# Altium PCB RF315Mhz.PcbDoc (part 1 of 2)
Units mm, origin at the board's own origin, x right, y up, seen from the top; angles counter-clockwise.
Board outline 104 x 96 mm, 2 copper layers (Top Layer, Bottom Layer); 125 components, 20 nets, 503 pads, 66 vias.
Unrouted connection lines stored in the file: 1.
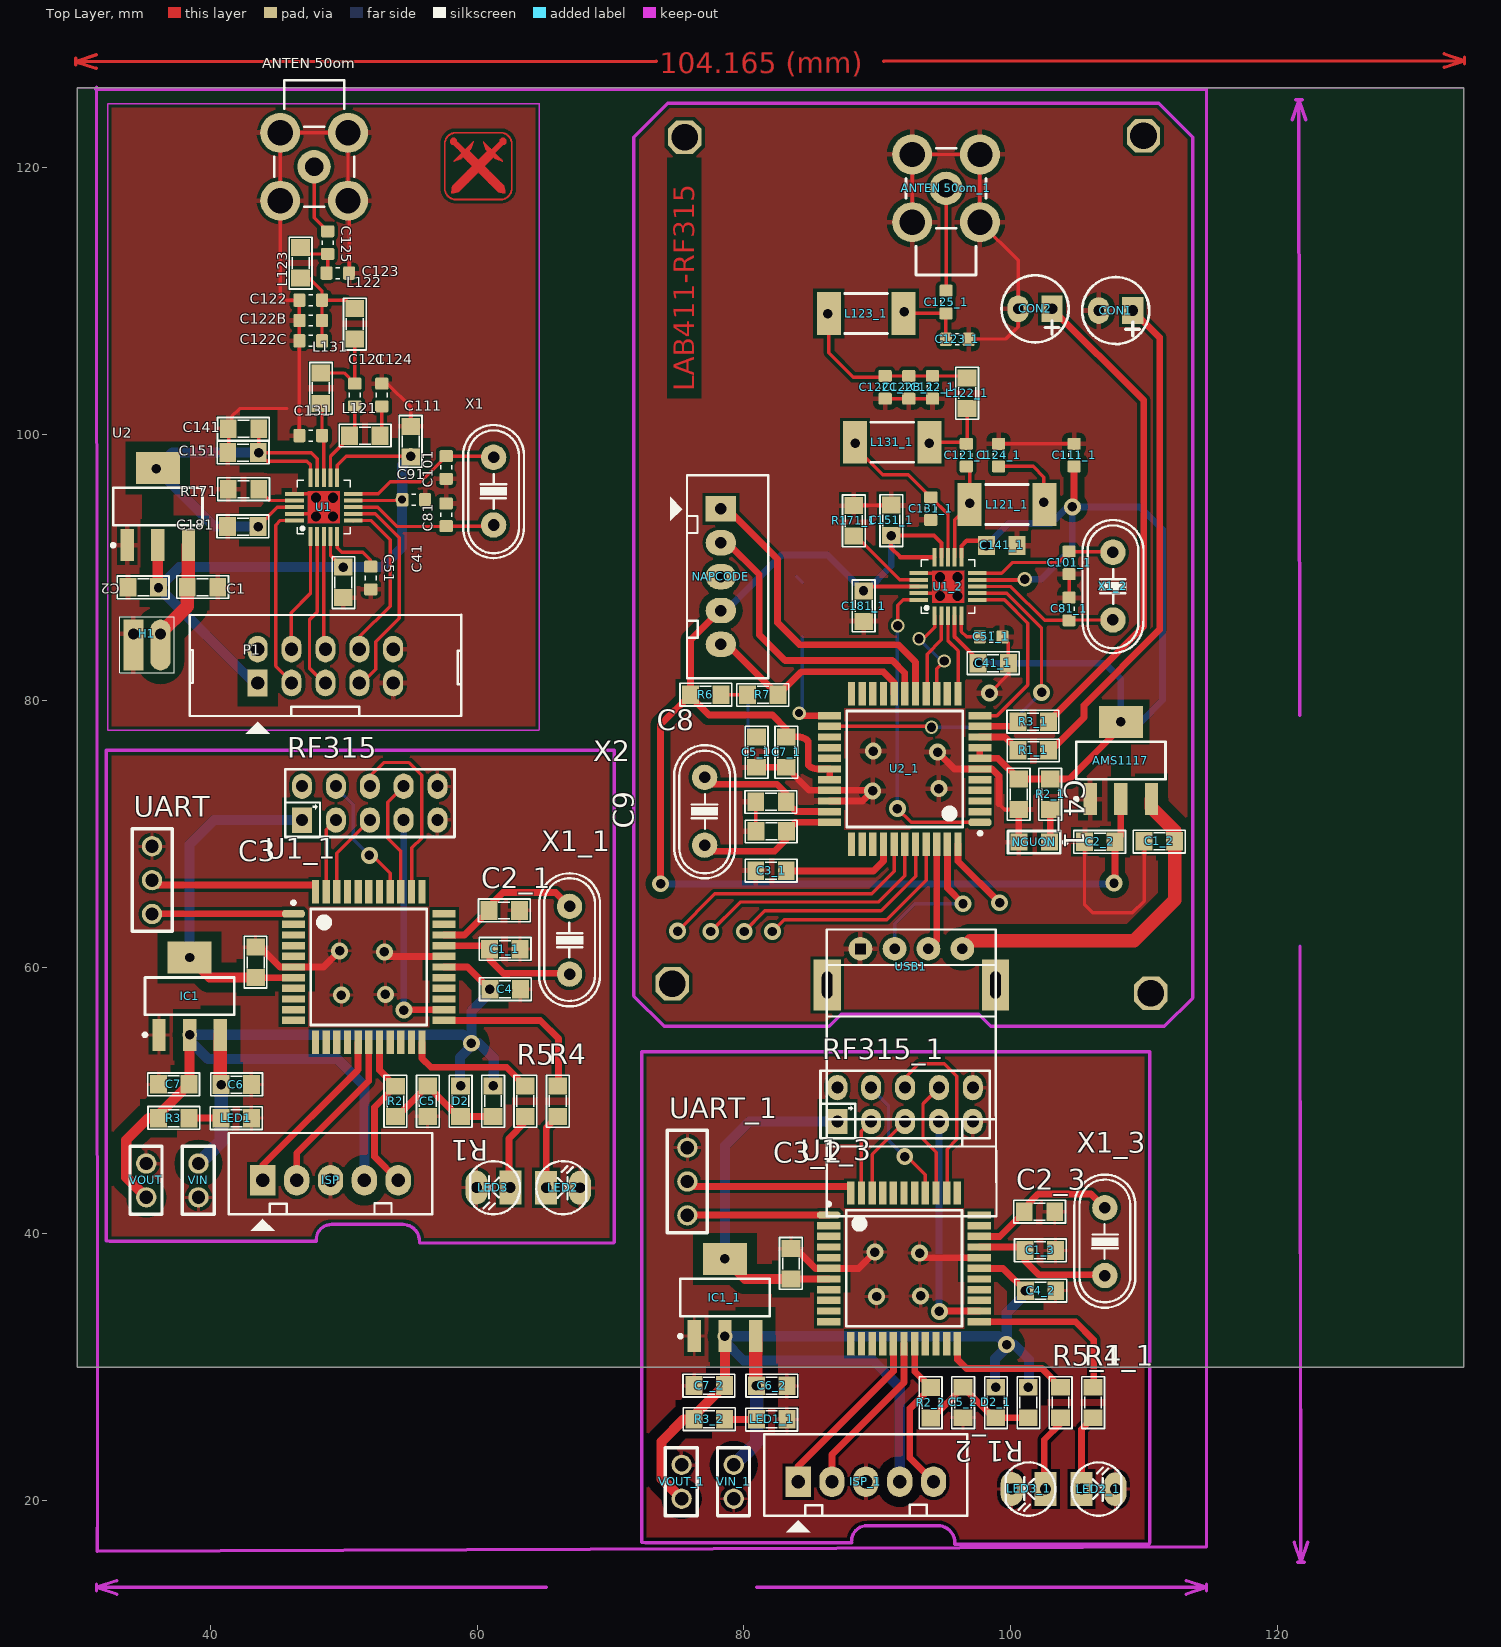
[diagram p0: Top Layer view]
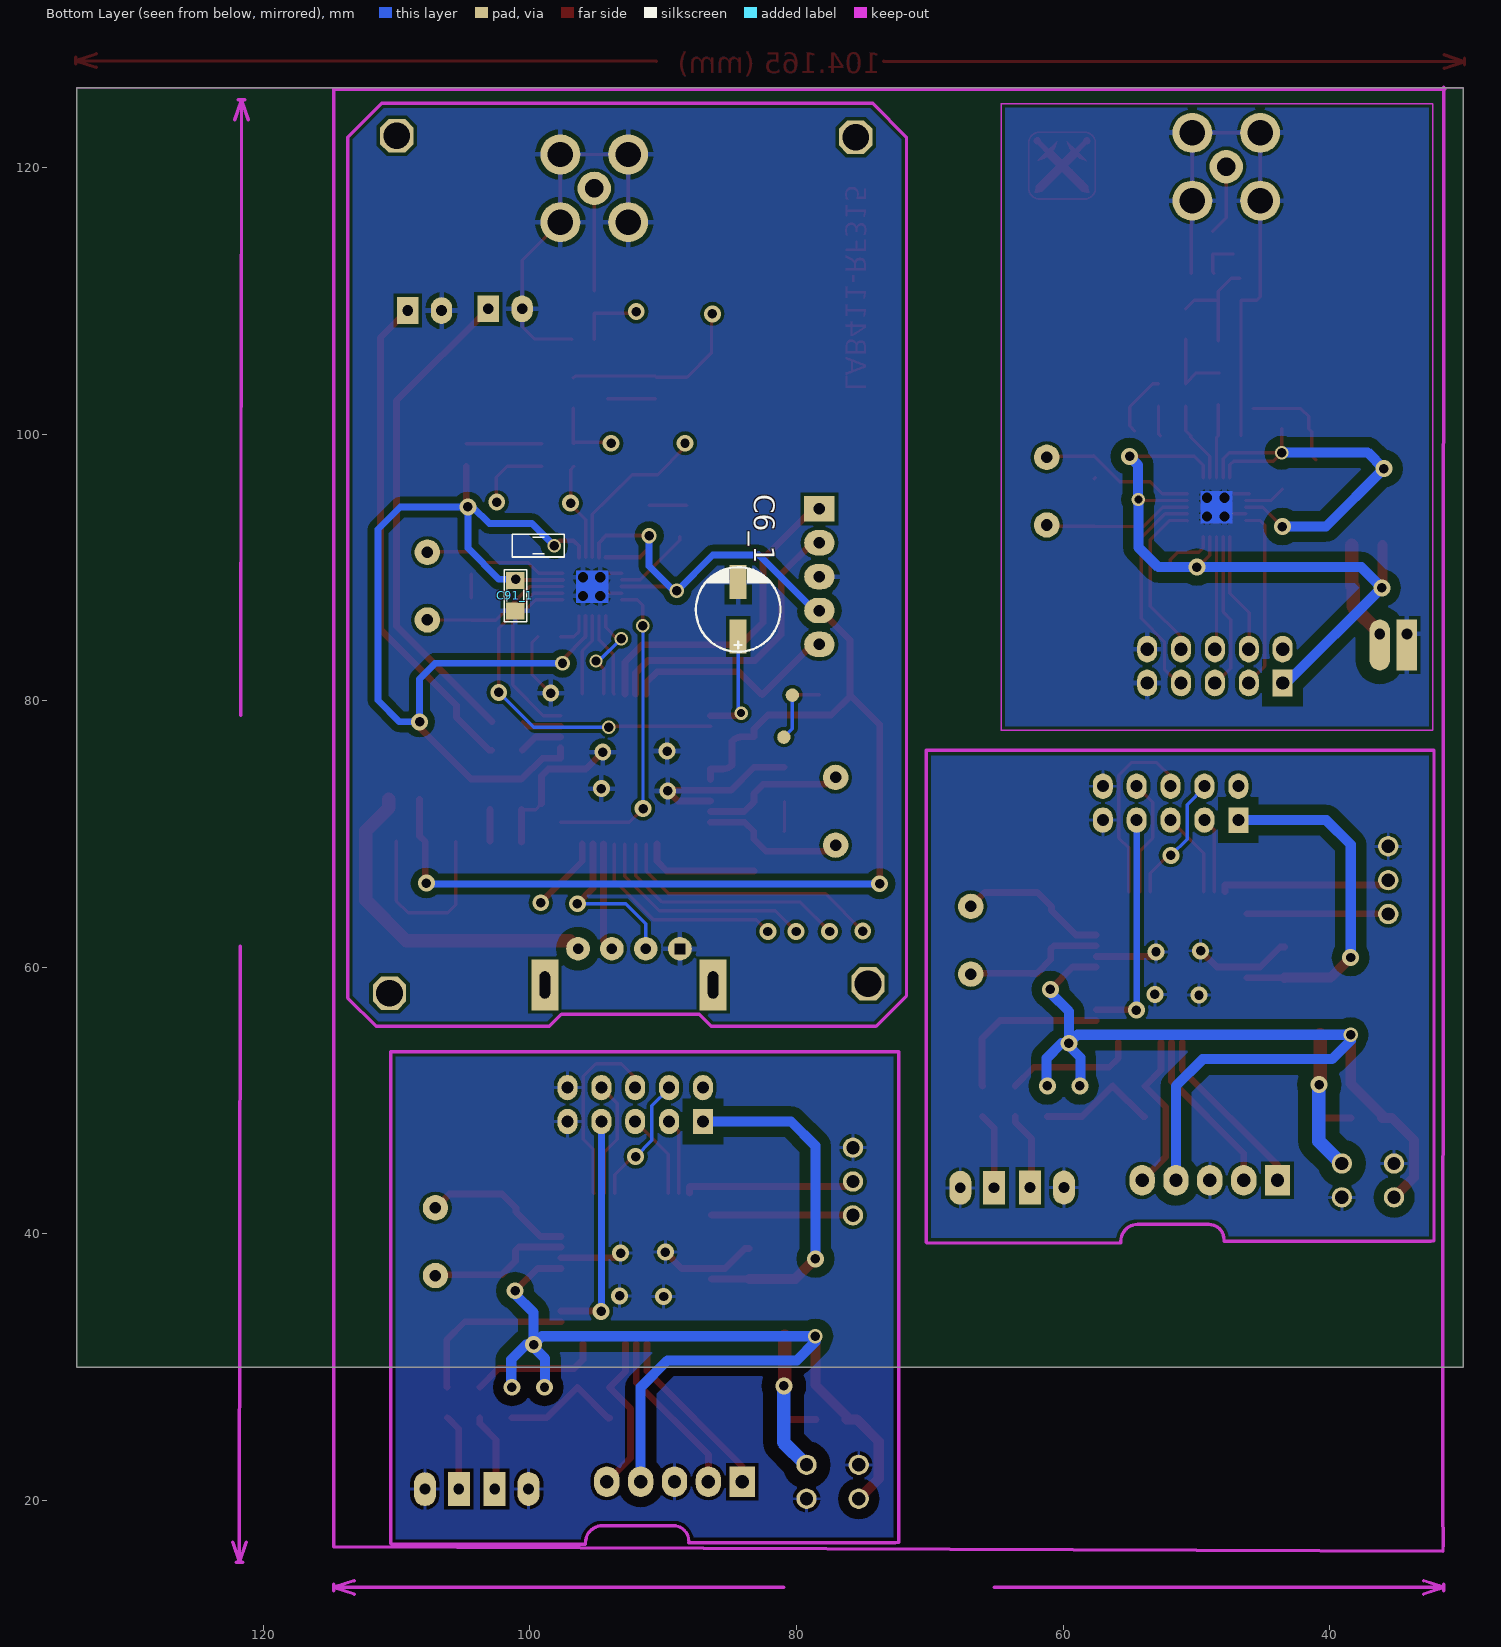
[diagram p1: Bottom Layer view, seen from below]

## Layer stack, top to bottom
Top Layer: signal copper 0.0356
Dielectric: dielectric 0.32, FR-4, Dk 4.8
Bottom Layer: signal copper 0.0356

## Board outline
30,30 30,126 134,126 134,30

## Design rules (kind name [scope] priority, off if disabled: settings)
Clearance 5 [InNet('+5V')] p1: gap=1.016
Clearance 3.3 [InNet('+3.3V')] p2: gap=0.762
Clearance [All] p3: gap=0.254
ComponentClearance [All] p1: gap=0.051 collisioncheckmode=3 verticalgap=0.051 showdistances=FALSE
PolygonConnect [All] p1: connectstyle=Relief reliefconductorwidth=0.381 reliefentries=4 polygonreliefangle="90 Angle" airgapwidth=0.254
RoutingVias [All] p1: holewidth=0.711 width=1.27 viastyle="Through Hole" minholewidth=0.711 minwidth=1.27 maxholewidth=0.711 maxwidth=1.27
ShortCircuit [All] p1: allowed=TRUE
SilkToSilkClearance [All] p1: silktosilkclearance=0.051
SilkToSolderMaskClearance [IsPad] p1: minsilkscreentomaskgap=0 clearancetoexposedcopper=TRUE
SolderMaskExpansion [All] p1: expansion=0.102
Width 5v [InNet('+5V')] p1: maxlimit=1.016 minlimit=1.016 preferedwidth=1.016
Width 3.3v [InNet('+3.3V')] p2: maxlimit=0.254 minlimit=0.254 preferedwidth=0.254
Width [All] p3: maxlimit=0.254 minlimit=0.254 preferedwidth=0.254
24 further rules are at their usual default settings.

## Components (designator, comment, footprint, x,y, rotation, side; value= is the part's Value field where it differs from the comment)
AMS1117 "LM317" SOT223-4N 108.28,75.514 r90 top
"ANTEN 50om" "Header 2" MCX5.08-H5 47.766,126.557 r270 top
"ANTEN 50om_1" "Header 2" MCX5.08-H5 95.174,111.938 r90 top (schematic designator "ANTEN 50om")
C1 "104" SM-0805#1 39.395,88.519 r180 top
C1_1 "103" SM-0805#1 62.078,61.366 r180 top (schematic designator C1)
C1_2 "104" SM-0805#1 111.176,69.444 r0 top (schematic designator C1)
C1_3 "103" SM-0805#1 102.235,38.76 r180 top (schematic designator C1)
C2 "104" SM-0805#1 34.95,88.519 r0 top
C2_1 "103" SM-0805#1 62.027,64.262 r180 top (schematic designator C2)
C2_2 "104" SM-0805#1 106.705,69.418 r0 top (schematic designator C2)
C2_3 "103" SM-0805#1 102.184,41.656 r180 top (schematic designator C2)
C3 "103" SM-0805#1 43.383,60.376 r270 top
C3_1 "103" SM-0805#1 82.042,67.234 r180 top (schematic designator C3)
C3_2 "103" SM-0805#1 83.541,37.77 r270 top (schematic designator C3)
C4 "103" SM-0805#1 62.103,58.344 r180 top
C4_1 "103" SM-0805#1 100.635,72.974 r270 top (schematic designator C4)
C4_2 "103" SM-0805#1 102.26,35.738 r180 top (schematic designator C4)
C5 "103" SM-0805#1 56.286,49.962 r90 top
C5_1 "103" SM-0805#1 80.95,76.149 r90 top (schematic designator C5)
C5_2 "103" SM-0805#1 96.444,27.356 r90 top (schematic designator C5)
C6 "103" SM-0805#1 41.935,51.206 r180 top
C6_1 "100uF/35V" CP1/2.5_SM 84.379,85.573 r90 bottom (schematic designator C6)
C6_2 "103" SM-0805#1 82.093,28.6 r180 top (schematic designator C6)
C7 "103" SM-0805#1 37.236,51.232 r0 top
C7_1 "103" SM-0805#1 83.185,76.149 r90 top (schematic designator C7)
C7_2 "103" SM-0805#1 77.394,28.626 r0 top (schematic designator C7)
C8 "33pF" SM-0805#1 82.067,70.206 r0 top
C9 "33pF" SM-0805#1 82.042,72.415 r0 top
C41 "104" SM-0805#1 49.962,88.875 r90 top
C41_1 "104" SM-0805#1 98.704,82.804 r180 top (schematic designator C41)
C51 "104" 0603ESDA#1 52.019,89.205 r90 top
C51_1 "104" 0603ESDA#2 98.552,84.785 r180 top (schematic designator C51)
C81 "27pF" 0603ESDA#1 57.672,93.943 r270 top
C81_1 "27pF" 0603ESDA#2 104.402,86.883 r270 top (schematic designator C81)
C91 "103" 0603ESDA#2 55.245,95.072 r180 top
C91_1 "103" SM-0805#1 101.092,87.884 r90 bottom (schematic designator C91)
C101 "27pF" 0603ESDA#1 57.672,97.499 r90 top
C101_1 "27pF" 0603ESDA#2 104.402,90.337 r90 top (schematic designator C101)
C111 "220pF" SM-0805#1 55.016,99.441 r270 top
C111_1 "220pF" 0603ESDA#2 104.775,98.425 r270 top (schematic designator C111)
C121 "6.8pF" 0603ESDA#1 50.814,102.935 r270 top
C121_1 "6.8pF" 0603ESDA#2 96.698,98.425 r270 top (schematic designator C121)
C122 "12pF" 0603ESDA#1 47.512,110.047 r180 top
C122_1 "12pF" 0603ESDA#2 94.158,103.505 r270 top (schematic designator C122)
C122B "12pF" 0603ESDA#1 47.512,108.523 r180 top
C122B_1 "12pF" 0603ESDA#2 92.38,103.505 r270 top (schematic designator C122B)
C122C "12pF" 0603ESDA#1 47.512,106.999 r180 top
C122C_1 "12pF" 0603ESDA#2 90.602,103.505 r270 top (schematic designator C122C)
C123 "6.8pF" 0603ESDA#1 49.544,112.079 r0 top
C123_1 "6.8pF" 0603ESDA#2 96.012,107.112 r0 top (schematic designator C123)
C124 "220pF" 0603ESDA#1 52.846,102.935 r270 top
C124_1 "220pF" 0603ESDA#2 99.111,98.425 r270 top (schematic designator C124)
C125 "220pF" 0603ESDA#1 48.782,114.365 r90 top
C125_1 "220pF" 0603ESDA#2 95.174,109.906 r90 top (schematic designator C125)
C131 "6.8pF" 0603ESDA#1 47.512,99.887 r180 top
C131_1 "27" 0603ESDA#2 94.031,94.412 r270 top (schematic designator C131)
C141 "103" SM-0805#1 42.469,100.406 r0 top
C141_1 "103" SM-0805#2 99.365,91.643 r180 bottom (schematic designator C141)
C151 "220pF" SM-0805#1 42.432,98.617 r180 top
C151_1 "220pF" SM-0805#1 91.059,93.523 r90 top (schematic designator C151)
C181 "220pF" SM-0805#1 42.418,93.066 r180 top
C181_1 "27pF" SM-0805#1 89.002,87.097 r270 top (schematic designator C181)
CON1 "LED" LED3mm 107.899,109.271 r180 top
CON2 "LED" LED3mm 101.854,109.398 r180 top
D2 "1N4007" SM-0805#1 58.75,49.962 r90 top
D2_1 "1N4007" SM-0805#1 98.908,27.356 r90 top (schematic designator D2)
H1 "Header 2" HDR1X2 33.96,85.014 r0 top
IC1 "LM1117" SOT223-4N 38.43,57.836 r90 top
IC1_1 "LM1117" SOT223-4N 78.588,35.23 r90 top (schematic designator IC1)
ISP "JP5" CON5#1 43.917,44.018 r0 top
ISP_1 "JP5" CON5#1 84.074,21.412 r0 top (schematic designator ISP)
L121 "33nH" SM-0805#1 51.576,99.887 r180 top
L121_1 "27nH" SM-2512 99.746,94.717 r180 top (schematic designator L121)
L122 "18nH" SM-0805#1 50.814,108.269 r90 top
L122_1 "22nH" SM-0805#1 96.749,103.073 r90 top (schematic designator L122)
L123 "33nH" SM-0805#1 46.75,112.841 r90 top
L123_1 "27nH" SM-2512 89.179,109.042 r0 top (schematic designator L123)
L131 "33nH" SM-0805#1 48.274,103.443 r90 top
L131_1 "27nH" SM-2512 91.135,99.39 r0 top (schematic designator L131)
LED1 "LED" SM-0805#1 41.935,48.692 r0 top
LED1_1 "LED" SM-0805#1 82.093,26.086 r0 top (schematic designator LED1)
LED2 "LED" LED-3 65.176,43.459 r0 top
LED2_1 "LED" LED-3 105.334,20.853 r0 top (schematic designator LED2)
LED3 "LED" LED-3 62.484,43.477 r180 top
LED3_1 "LED" LED-3 102.641,20.871 r180 top (schematic designator LED3)
NAPCODE "JP5" CON5#2 78.283,94.386 r270 top
NGUON "LED" LED0805 101.778,69.393 r180 top
P1 "Header 6" Hed2X5 43.536,81.331 r0 top
R1 "1k" SM-0805#1 61.189,49.962 r90 top
R1_1 "220" SM-0805#1 101.727,76.276 r0 top (schematic designator R1)
R1_2 "1k" SM-0805#1 101.346,27.356 r90 top (schematic designator R1)
R2 "1k" SM-0805#1 53.873,49.936 r270 top
R2_1 "220" SM-0805#1 102.997,72.974 r270 top (schematic designator R2)
R2_2 "1k" SM-0805#1 94.031,27.33 r270 top (schematic designator R2)
R3 "1k" SM-0805#1 37.236,48.692 r180 top
R3_1 "220" SM-0805#1 101.702,78.435 r0 top (schematic designator R3)
R3_2 "1k" SM-0805#1 77.394,26.086 r180 top (schematic designator R3)
R4 "1k" SM-0805#1 66.04,49.962 r90 top
R4_1 "1k" SM-0805#1 106.197,27.356 r90 top (schematic designator R4)
R5 "1k" SM-0805#1 63.602,49.962 r90 top
R5_1 "1k" SM-0805#1 103.759,27.356 r90 top (schematic designator R5)
R6 "1k" SM-0805#1 77.14,80.442 r180 top
R7 "1k" SM-0805#1 81.432,80.442 r0 top
R171 "56K" SM-0805#1 42.469,95.86 r180 top
R171_1 "56K" SM-0805#1 88.24,93.497 r90 top (schematic designator R171)
RF315 "Header 5x2" HED2X5_cen 46.863,71.044 r0 top
RF315_1 "Header 5x2" HED2X5_cen 87.02,48.438 r0 top (schematic designator RF315)
U1 "CC1101" QFN-20Pin 46.496,92.521 r90 top
U1_1 "PIC18F46K20T-I/PT" TQFP-PT44_N 51.867,60.02 r0 top (schematic designator U1)
U1_2 "CC1101" QFN-20Pin 93.32,86.563 r90 top (schematic designator U1)
U1_3 "PIC18F46K20T-I/PT" TQFP-PT44_N 92.024,37.414 r0 top (schematic designator U1)
U2 "LM1117" SOT223-4N 36.043,94.564 r90 top
U2_1 "PIC18F45J50-I/ML" PIC18F45J50SMD 92.075,74.879 r180 top (schematic designator U2)
UART "JP3" CON3 35.611,66.497 r90 top
UART_1 "JP3" CON3 75.768,43.891 r90 top (schematic designator UART)
USB1 "USB-S" USB-A 96.393,61.392 r180 top
VIN "JP2" CON2 39.091,44.044 r90 top
VIN_1 "JP2" CON2 79.248,21.438 r90 top (schematic designator VIN)
VOUT "JP2" CON2 35.179,44.044 r90 top
VOUT_1 "JP2" CON2 75.336,21.438 r90 top (schematic designator VOUT)
X1 "26Mhz" XT2 61.228,95.721 r90 top
X1_1 "4Mhz" XT2 66.929,62.027 r270 top (schematic designator X1)
X1_2 "26Mhz" XT2 107.696,88.595 r90 top (schematic designator X1)
X1_3 "4Mhz" XT2 107.086,39.421 r270 top (schematic designator X1)
X2 "20Mhz" XT2 77.064,71.704 r90 top

## Footprints (in the part's own frame and the unit in brackets; to place one, negate y for a bottom-side part, rotate by r counter-clockwise, add the part's x,y. Pads: shape width x height; smd on the part's side, far side on the other; paste and mask are expansions set on the pad)
0603ESDA#1 [mm] "Chip ESD suppressor, Body 1.6x0.8mm, 0603, IPC Medium Density"
  round 0.254 on Mech14: 0(0,0)
  rrect25% 0.9x1 smd: 1(-0.85,0) 2(0.85,0)
  Top Layer pour cut-out: -0.4,0.6 0.4,0.6 0.4,-0.6 -0.4,-0.6
  silkscreen extent -0.15,-0.41 0.15,0.41, body extent -0.85,-0.45 0.85,0.45, height 0.79
0603ESDA#2 [mm] "Chip ESD suppressor, Body 1.6x0.8mm, 0603, IPC Medium Density"
  round 0.254 on Mech15: 0(0,0)
  rrect25% 0.9x1 smd: 1(-0.85,0) 2(0.85,0)
  Top Layer pour cut-out: -0.65,0.5 -0.45,0.7 0.45,0.7 0.65,0.5 0.65,-0.5 0.45,-0.7 -0.45,-0.7 -0.65,-0.5
  silkscreen extent -0.15,-0.41 0.15,0.41, body extent -0.85,-0.45 0.85,0.45, height 0.79
CON2 [mm] "2-Pin Connector; pitch 2.54mm"
  round 1.524 hole 1: 1(-1.3,0) 2(1.24,0)
  silkscreen extent -2.58,-1.18 2.52,1.22
CON3 [mm] "3-Pin Connector; pitch 2.54mm"
  round 1.524 hole 1: 1(-2.5,0) 2(0.04,0) 3(2.58,0)
  silkscreen extent -3.8,-1.5 3.9,1.5
CON5#1 [mm] "CON5"
  rect 1.905x2.286 hole 1: 1(0,0)
  oval 1.905x2.286 hole 1: 2(2.54,0) 3(5.08,0) 4(7.62,0) 5(10.16,0)
  silkscreen extent -2.54,-3.8 12.7,3.56, body extent -2.63,-2.7 12.83,3.7, height 7
CON5#2 [mm] "CON5"
  rect 1.905x2.286 hole 0.864: 1(0,0)
  oval 1.905x2.286 hole 0.864: 2(2.54,0) 3(5.08,0) 4(7.62,0) 5(10.16,0)
  silkscreen extent -2.54,-3.8 12.7,3.56
CP1/2.5_SM [mil] "Tu hoa SMD 33 >100 uF,50V, 220uF/16V,25V"
  rect 100x50 smd: 1(-30,0) 2(131,0)
  silkscreen extent -75,-125 175,125
HDR1X2 [mil] "Connector; Header; 2 Position"
  rect 60x150 hole 32 copper offset 0,-33: 1(10,0)
  oval 60x150 hole 32 copper offset 0,-33: 2(90,0)
  silkscreen extent -30,-115 130,50
Hed2X5 [mm] "Header 10x2,20 pin, connecter"
  rect 1.5x2 hole 1: 1(0,0)
  oval 1.5x2 hole 1: 2(0,2.54) 3(2.54,0) 4(2.54,2.54) 5(5.08,0) 6(5.08,2.54) 7(7.62,0) 8(7.62,2.54) 9(10.16,0) 10(10.16,2.54)
  silkscreen extent -5.1,-3.81 15.29,5.11
HED2X5_cen [mm] "Connector; Header; 5x2 Position"
  rect 1.5x1.9 hole 0.9: 1(0,0)
  oval 1.5x1.9 hole 0.9: 2(2.54,0) 3(5.08,0) 4(7.62,0) 5(10.16,0) 6(0,2.54) 7(2.54,2.54) 8(5.08,2.54) 9(7.62,2.54) 10(10.16,2.54)
  silkscreen extent -1.27,-1.27 11.43,3.81, body extent -1.24,-10.02 11.46,2.86, height 5.02
LED3mm [mm]
  rect 1.6x2 hole 0.8: 1(-1.27,0)
  oval 1.6x2 hole 0.8: 2(1.27,0)
  silkscreen extent -2.52,-2.51 2.51,2.52, body extent -1.99,-1.5 1.99,1.99, height 5.38
LED0805 [mil] "Chip Resistor; Body 2.0 x 1.3 mm (LxW typ)"
  rect 50x50 smd: 1(-45,0) 2(45,0)
  silkscreen extent -97,-33 77,33, body extent -60,-25 60,25, height 47
LED-3 [mil] "LED 2 PIN, 3ly Only colour"
  rect 65x100 hole 32: 1(0,0)
  oval 65x100 hole 32: 2(100,0)
  silkscreen extent -29,-78 118,79, body extent -29,-75 109,75, height 256
MCX5.08-H5 [mm] "Chan anten"
  round 2.5 hole 1.4: 1(6.5,0)
  round 3 hole 1.9: 2(3.96,2.54) 2(3.96,-2.54) 2(9.04,-2.54) 2(9.04,2.54)
  silkscreen extent 0,-3 9.5,3
PIC18F45J50SMD [mm] "PIC18F45J50SMD"
  oct 1.75x0.55 smd: 1(-5.65,4)
  rect 1.75x0.55 smd: 2(-5.65,3.2) 3(-5.65,2.4) 4(-5.65,1.6) 5(-5.65,0.8) 6(-5.65,0) 7(-5.65,-0.8) 8(-5.65,-1.6) 9(-5.65,-2.4) 10(-5.65,-3.2) 11(-5.65,-4) 23(5.65,-4) 24(5.65,-3.2) 25(5.65,-2.4) 26(5.65,-1.6) 27(5.65,-0.8) 28(5.65,0) 29(5.65,0.8) 30(5.65,1.6) 31(5.65,2.4) 32(5.65,3.2) 33(5.65,4)
  rect 0.55x1.75 smd: 12(-4,-5.65) 13(-3.2,-5.65) 14(-2.4,-5.65) 15(-1.6,-5.65) 16(-0.8,-5.65) 17(0,-5.65) 18(0.8,-5.65) 19(1.6,-5.65) 20(2.4,-5.65) 21(3.2,-5.65) 22(4,-5.65) 34(4,5.65) 35(3.2,5.65) 36(2.4,5.65) 37(1.6,5.65) 38(0.8,5.65) 39(0,5.65) 40(-0.8,5.65) 41(-1.6,5.65) 42(-2.4,5.65) 43(-3.2,5.65) 44(-4,5.65)
  silkscreen extent -5.77,-4.35 4.35,4.95, body extent -5,-5 5,5, height 1.2
QFN-20Pin [mm] "QFN 20pin 4x4mm"
  rect 1.4x0.3 smd paste+0.1 mask+0.1: 1(-0.2,-1) 2(-0.2,-1.5) 3(-0.2,-2) 4(-0.2,-2.5) 5(-0.2,-3) 11(4.2,-3) 12(4.2,-2.5) 13(4.2,-2) 14(4.2,-1.5) 15(4.2,-1)
  rect 0.3x1.4 smd paste+0.1 mask+0.1: 6(1,-4.2) 7(1.5,-4.2) 8(2,-4.2) 9(2.5,-4.2) 10(3,-4.2) 16(3,0.2) 17(2.5,0.2) 18(2,0.2) 19(1.5,0.2) 20(1,0.2)
  round 0 hole 0.762: 21(1.3,-1.4) 21(1.3,-2.7) 21(2.7,-2.7) 21(2.7,-1.4)
  Top Layer region: 0.8,-0.8 3.2,-0.8 3.2,-3.2 0.8,-3.2
  Bottom Layer region: 0.8,-0.8 3.2,-0.8 3.2,-3.2 0.8,-3.2
  Top Overlay keep-out circle w0.254: c0.4,-0.4 r0.1
  silkscreen extent 0,-4 4,0
SM-0805#1 [mil] "Compoment SMD 80x50mil"
  rect 50x55 smd: 1(-45,0) 2(45,0)
  silkscreen extent -77,-34 76,33, body extent -40,-27 40,23, height 24
SM-0805#2 [mil] "Compoment SMD 80x50mil"
  rect 50x55 smd far side: 1(-45,0) 2(45,0)
  silkscreen extent -77,-34 76,33, body extent -40,-27 40,23, height 24
SM-2512 [mm] "Chip Resistor; Body 6.3 x 3.2 mm (LxW typ) - C"
  rect 1.8x3.2 smd: 1(-2.8,0) 2(2.8,0)
  silkscreen extent -1.6,-1.5 1.6,1.5
SOT223-4N [mm] "SOT223, 4-Leads, Body 6.5x3.5mm, Pitch 2.3mm, Lead Span 7mm, IPC Medium Density"
  rect 2.4x1 smd: 1(-2.9,2.3) 2(-2.9,0) 3(-2.9,-2.3)
  rect 2.4x3.3 smd: 4(2.9,0)
  silkscreen extent -3.02,-3.35 1.4,3.47, body extent -3.39,-3.27 3.5,3.23, height 1.72
TQFP-PT44_N [mm] "Thin QFP, 44-Leads, Body 10x10mm, Pitch 0.8mm, IPC Medium Density"
  oct 1.75x0.55 smd: 1(-5.65,4)
  rect 1.75x0.55 smd: 2(-5.65,3.2) 3(-5.65,2.4) 4(-5.65,1.6) 5(-5.65,0.8) 6(-5.65,0) 7(-5.65,-0.8) 8(-5.65,-1.6) 9(-5.65,-2.4) 10(-5.65,-3.2) 11(-5.65,-4) 23(5.65,-4) 24(5.65,-3.2) 25(5.65,-2.4) 26(5.65,-1.6) 27(5.65,-0.8) 28(5.65,0) 29(5.65,0.8) 30(5.65,1.6) 31(5.65,2.4) 32(5.65,3.2) 33(5.65,4)
  rect 0.55x1.75 smd: 12(-4,-5.65) 13(-3.2,-5.65) 14(-2.4,-5.65) 15(-1.6,-5.65) 16(-0.8,-5.65) 17(0,-5.65) 18(0.8,-5.65) 19(1.6,-5.65) 20(2.4,-5.65) 21(3.2,-5.65) 22(4,-5.65) 34(4,5.65) 35(3.2,5.65) 36(2.4,5.65) 37(1.6,5.65) 38(0.8,5.65) 39(0,5.65) 40(-0.8,5.65) 41(-1.6,5.65) 42(-2.4,5.65) 43(-3.2,5.65) 44(-4,5.65)
  silkscreen extent -5.77,-4.35 4.35,4.95, body extent -5,-5 5,5, height 1.2
USB-A [mil]
  round 70 hole 31: 1(0,0) 2(100,0) 3(200,0)
  round 70 hole 31 square: 4(301,0)
  rect 80x150 hole 31 slot 80 at 90 deg: 5(-98,107) 6(399,107)
  silkscreen extent -101,-57 401,790, body extent -97,0 399,784, height 177
XT2 [mil] "Footpin for Crystal 2 pin"
  round 75 hole 34: 1(-100,0) 2(100,0)
  silkscreen extent -198,-90 195,90, body extent -233,-93 213,90, height 138

## Part data
AMS1117: "Adj Voltage +1.2 -> +37V"
"ANTEN 50om" "ANTEN 50om_1" H1: library part Hed2, "Header 2 (Green)"
C1 C1_2 C2 C2_2: library part Cap, "Capacitor"
C1_1 C1_3 C2_1 C2_3 C3 C3_1 C3_2 C4 C4_1 C4_2 C5 C5_1 C5_2 C6 C6_2 C7 C7_1 C7_2 C41 C41_1 C51 C51_1 C81 C81_1 C91 C91_1 C101 C101_1 C111 C111_1 C121 C121_1 C122 C122_1 C122B C122B_1 C122C C122C_1 C123 C123_1 C124 C124_1 C125 C125_1 C131 C131_1 C141 C141_1 C151 C151_1 C181 C181_1: library part CM, "Cap SMD"
C6_1: library part CP3, "Cap 100uF/35V - 470uF/16V"
C8 C9: library part CN0, "Cremic For Xtal 1pF => 100pF"
CON1 CON2 LED1 LED1_1 LED2 LED2_1 LED3 LED3_1 NGUON: "LED Single colour Green and Red"
D2 D2_1: library part D1A, "Diode 1A"
IC1 IC1_1 U2: "3v3"
ISP ISP_1 NAPCODE: library part Con5, "Connector 5"
L121 L121_1 L122 L122_1 L123 L123_1 L131 L131_1: library part L1, "Inductor"
P1: "Header, 6-Pin"
R1 R1_1 R1_2 R2 R2_1 R2_2 R3 R3_1 R3_2 R4 R4_1 R5 R5_1 R6 R7: library part R, "Resistor 1/4W"
R171 R171_1: library part RM, "Resistor SMD"
RF315 RF315_1: library part HED5x2
U1 U1_2: "Transceiver 315Mhz"
U1_1 U1_3: "Flash Microcontroller with 10-Bit A/D and nanoWatt Technology, 32K Flash, 44-Pin TQFP, Industrial Temperature Range, Tape and Reel"
U2_1: "Low Power, High Performance USB Microcontroller with nanoWatt XLP Technology, 44-pin QFN, Industrial Temperature"
UART UART_1: library part Con3, "Connector 3"
USB1: library part USB_S, "USB connector"
VIN VIN_1 VOUT VOUT_1: library part Con2, "Connector 2"
X1 X1_1 X1_2 X1_3 X2: library part XT2, "Crystal For all Crystal 2pin."

## Free pads (board coordinates)
  oct 2.5x2.5 hole 2: 0(109.982,122.377) 1(75.565,122.276) 2(110.536,58.065) 3(74.636,58.765)
  round 1 all layers, no hole: 2(80.315,80.416) 3(80.95,77.267)

## Via types
v1: diameter 1.27, hole 0.711, Top Layer to Bottom Layer, 52 vias
v2: diameter 1, hole 0.7, Top Layer to Bottom Layer, 5 vias
v3: diameter 1.1, hole 0.7, Top Layer to Bottom Layer, 3 vias
v4: diameter 1.1, hole 0.711, Top Layer to Bottom Layer, 2 vias
v5: diameter 1, hole 0.6, Top Layer to Bottom Layer, 2 vias
v6: diameter 1.143, hole 0.711, Top Layer to Bottom Layer, 1 vias
v7: diameter 1, hole 0.711, Top Layer to Bottom Layer, 1 vias

## Nets (pads, with @x,y where several pads share a name; then routed paths per layer and width w, separated by ;. In a path a pad name is that pad's centre, name@x,y a point inside that pad or via, vN(x,y) a via of type N, cw(c..) or ccw(c..) an arc to the next point about the centre after c; other vN are vias at no path point)
+3.3V: C2.2 C41.2 C91.2 C111.2 C141.2 C151.1 C181.1 P1.1 U1.4 U1.9 U1.11 U1.14 U1.15 U1.18 U2.2 U2.4 | length 87.6
  Top Layer w0.254: v1(43.561,93.066) 45.016,94.521 U1.18@46.296,94.521 ; C151.1@43.612,98.628 C141.2@43.612,100.406 ; U1.15@47.496,96.721 47.496,97.69 47.219,97.968 44.247,97.968 v7(43.612,98.603) 47.549,98.603 47.996,98.155 U1.14@47.996,96.721 ; U1.4@48.996,92.321 48.996,90.907 C41.2@49.886,90.018 ; U1.11@49.496,96.721 49.496,97.68 50.165,98.349 55.042,98.349 C111.2@55.093,98.298 ; U1.9@50.696,95.021 54.381,95.021 C91.2@54.407,95.047
  Top Layer w0.762: U2.4@35.941,97.46 U2.4@36.043,97.358 ; C2.2@36.043,88.468 U2.2@36.043,91.664
  Bottom Layer w0.254: v5@54.305,95.072 v5@54.381,95.148 ; 54.381,97.688 54.407,97.688
  Bottom Layer w0.762: v1(36.093,88.468) v1@36.106,88.481 ; P1.1@43.536,81.331 43.256,81.331 v1@36.106,88.481 ; v1(43.561,93.066) 40.284,93.066 v1(35.941,97.409) 37.16,98.628 v7@43.586,98.628 ; v1(49.962,90.018) 52.857,90.018 54.356,91.516 54.356,95.021 v5@54.381,95.047 ; v1@49.962,90.068 49.911,90.018 37.643,90.018 v1@36.106,88.481 ; v5(54.356,95.098) v5@54.381,95.123 ; v5@54.381,95.148 54.381,97.688 ; 54.407,97.688 v1@55.067,98.349
  other v1: 55.016,98.323
+5V: C1.2 H1.2 U2.3 | length 7.5
  Top Layer w1.016: H1.2@36.195,85.014 38.252,87.071 C1.2@38.252,88.519 ; C1.2@38.252,88.544 38.343,88.635 U2.3@38.343,91.664
CSN: P1.7 U1.7 | length 16.5
  Top Layer w0.254: U1.7@50.696,94.021 52.36,94.021 54.153,92.227 54.153,86.182 52.4,84.43 52.4,82.372 51.359,81.331 P1.7@51.156,81.331 P1.7@51.13,81.331
GDO0: P1.8 U1.6 | length 12.5
  Top Layer w0.254: U1.6@50.698,93.497 50.724,93.523 52.019,93.523 53.467,92.075 53.467,87.097 51.156,84.785 P1.8@51.156,83.871
GDO2: P1.6 U1.3 | length 8.5
  Top Layer w0.254: U1.3@48.496,92.321 48.496,84.015 P1.6@48.616,83.896
GND: "ANTEN 50om.2" C1.1 C2.1 C41.1 C51.1 C81.1 C91.1 C101.1 C111.1 C122.2 C122B.2 C122C.2 C123.2 C124.1 C131.2 C141.1 C151.2 C181.2 H1.1 P1.9 P1.10 R171.2 U1.16 U1.19 U1.21 U2.1 | length 56
  Top Layer w0.254: C151.2@41.035,98.07 C151.2@41.582,98.617 ; C151.2@41.351,98.848 41.351,100.163 41.582,100.395 41.582,101.323 42.178,101.919 45.734,101.919 ; U1.16@46.036,95.521 U1.16@46.296,95.521 47.558,95.521 47.879,95.199 ; U1.19@46.296,94.021 47.762,94.021 47.93,93.853 ; C131.2@46.662,99.887 46.662,100.991 C122C.2@46.662,106.999 C122B.2@46.662,108.523 C122.2@46.662,110.047 45.48,110.047 45.226,110.301 45.226,117.517 45.226,122.597 50.306,122.597 50.306,117.517 50.394,117.429 C123.2@50.394,112.079 ; C124.1@52.846,103.785 53.266,103.785 55.016,102.035 55.016,100.621 C111.1@54.624,100.229 ; C101.1@57.584,96.737 C101.1@57.672,96.649
"NetANTEN 50om_1": "ANTEN 50om.1" C125.2 | length 5.3
  Top Layer w0.254: 47.766,120.057 47.766,116.231 C125.2@48.782,115.215
NetC51_2: C51.2 U1.5 | length 4.2
  Top Layer w0.254: U1.5@49.496,92.321 49.496,91.474 49.835,91.135 51.41,91.135 51.968,90.576 C51.2@51.968,90.043
NetC81_2: C81.2 U1.8 X1.1 | length 11
  Top Layer w0.254: U1.8@50.696,94.521 52.545,94.521 54,93.066 C81.2@57.658,93.066 ; C81.2@57.672,93.093 X1.1@61.14,93.093
NetC101_2: C101.2 U1.10 X1.2 | length 11.8
  Top Layer w0.254: U1.10@50.696,95.521 52.569,95.521 53.467,96.418 55.753,96.418 C101.2@57.684,98.349 ; C101.2@57.709,98.374 C101.2@57.684,98.349 ; X1.2@61.228,98.261 61.14,98.349 C101.2@57.684,98.349
NetC121_1: C121.1 L122.1 L131.2 | length 6.2
  Top Layer w0.254: L131.2@48.274,104.586 50.013,104.586 C121.1@50.814,103.785 L122.1@50.814,107.126
NetC121_2: C121.2 L121.2 U1.12 | length 6.1
  Top Layer w0.254: U1.12@48.996,96.721 48.996,98.323 50.433,99.76 L121.2@50.433,99.887 50.814,100.268 C121.2@50.814,102.085
NetC122_1: C122.1 C122B.1 C122C.1 L122.2 L123.1 | length 8.5
  Top Layer w0.254: L123.1@46.75,111.698 47.385,111.698 48.362,110.721 C122.1@48.362,110.047 ; C122C.1@48.362,106.999 C122B.1@48.362,108.523 C122.1@48.362,110.047 ; L122.2@50.814,109.412 50.179,110.047 C122.1@48.362,110.047
NetC123_1: C123.1 C125.1 L123.2 | length 3
  Top Layer w0.254: L123.2@47.219,113.515 C125.1@48.782,113.515 48.782,112.167 C123.1@48.694,112.079
NetC124_2: C124.2 L121.1 | length 2.3
  Top Layer w0.254: L121.1@52.719,99.887 52.846,100.014 C124.2@52.846,102.085
NetC131_1: C131.1 L131.1 U1.13 | length 5.4
  Top Layer w0.254: C131.1@48.362,99.887 L131.1@48.362,102.212 ; U1.13@48.496,96.721 C131.1@48.496,99.753
NetR171_1: R171.1 U1.17 | length 3.1
  Top Layer w0.254: R171.1@43.561,95.86 44.4,95.021 U1.17@46.296,95.021
SCK: P1.4 U1.1 | length 9
  Top Layer w0.254: P1.4@46.05,83.871 46.05,86.614 47.496,88.06 U1.1@47.496,92.321
SI: P1.3 U1.20 | length 13.9
  Top Layer w0.254: P1.3@46.126,81.356 44.882,82.601 44.882,93.167 45.235,93.521 U1.20@46.296,93.521
SO: P1.5 U1.2 | length 11.8
  Top Layer w0.254: U1.2@47.996,92.321 47.996,86.655 47.422,86.081 47.422,82.448 P1.5@48.641,81.229
pads on no net: "ANTEN 50om_1.1" "ANTEN 50om_1.2" AMS1117.1 AMS1117.2 AMS1117.3 AMS1117.4 C1_1.1 C1_1.2 C1_2.1 C1_2.2 C1_3.1 C1_3.2 C2_1.1 C2_1.2 C2_2.1 C2_2.2 C2_3.1 C2_3.2 C3.1 C3.2 C3_1.1 C3_1.2 C3_2.1 C3_2.2 C4.1 C4.2 C4_1.1 C4_1.2 C4_2.1 C4_2.2 C5.1 C5.2 C5_1.1 C5_1.2 C5_2.1 C5_2.2 C6.1 C6.2 C6_1.1 C6_1.2 C6_2.1 C6_2.2 C7.1 C7.2 C7_1.1 C7_1.2 C7_2.1 C7_2.2 C8.1 C8.2 C9.1 C9.2 C41_1.1 C41_1.2 C51.0 C51_1.0 C51_1.1 C51_1.2 C81.0 C81_1.0 C81_1.1 C81_1.2 C91.0 C91_1.1 C91_1.2 C101.0 C101_1.0 C101_1.1 C101_1.2 C111_1.0 C111_1.1 C111_1.2 C121.0 C121_1.0 C121_1.1 C121_1.2 C122.0 C122_1.0 C122_1.1 C122_1.2 C122B.0 C122B_1.0 C122B_1.1 C122B_1.2 C122C.0 C122C_1.0 C122C_1.1 C122C_1.2 C123.0 C123_1.0 C123_1.1 C123_1.2 C124.0 C124_1.0 C124_1.1 C124_1.2 C125.0 C125_1.0 C125_1.1 C125_1.2 C131.0 C131_1.0 C131_1.1 C131_1.2 C141_1.1 C141_1.2 C151_1.1 C151_1.2 C181_1.1 C181_1.2 CON1.1 CON1.2 CON2.1 CON2.2 D2.1 D2.2 D2_1.1 D2_1.2 IC1.1 IC1.2 IC1.3 IC1.4 IC1_1.1 IC1_1.2 IC1_1.3 IC1_1.4 ISP.1 ISP.2 ISP.3 ISP.4 ISP.5 ISP_1.1 ISP_1.2 ISP_1.3 ISP_1.4 ISP_1.5 L121_1.1 L121_1.2 L122_1.1 L122_1.2 L123_1.1 L123_1.2 L131_1.1 L131_1.2 LED1.1 LED1.2 LED1_1.1 LED1_1.2 LED2.1 LED2.2 LED2_1.1 LED2_1.2 LED3.1 LED3.2 LED3_1.1 LED3_1.2 NAPCODE.1 NAPCODE.2 NAPCODE.3 NAPCODE.4 NAPCODE.5 NGUON.1 NGUON.2 P1.2 R1.1 R1.2 R1_1.1 R1_1.2 R1_2.1 R1_2.2 R2.1 R2.2 R2_1.1 R2_1.2 R2_2.1 R2_2.2 R3.1 R3.2 R3_1.1 R3_1.2 R3_2.1 R3_2.2 R4.1 R4.2 R4_1.1 R4_1.2 R5.1 R5.2 R5_1.1 R5_1.2 R6.1 R6.2 R7.1 R7.2 R171_1.1 R171_1.2 RF315.1 RF315.2 RF315.3 RF315.4 RF315.5 RF315.6 RF315.7 RF315.8 RF315.9 RF315.10 RF315_1.1 RF315_1.2 RF315_1.3 RF315_1.4 RF315_1.5 RF315_1.6 RF315_1.7 RF315_1.8 RF315_1.9 RF315_1.10 U1_1.1 U1_1.2 U1_1.3 U1_1.4 U1_1.5 U1_1.6 U1_1.7 U1_1.8 U1_1.9 U1_1.10 U1_1.11 U1_1.12 U1_1.13 U1_1.14 U1_1.15 U1_1.16 U1_1.17 U1_1.18 U1_1.19 U1_1.20 U1_1.21 U1_1.22 U1_1.23 U1_1.24 U1_1.25 U1_1.26 U1_1.27 U1_1.28 U1_1.29 U1_1.30 U1_1.31 U1_1.32 U1_1.33 U1_1.34 U1_1.35 U1_1.36 U1_1.37 U1_1.38 U1_1.39 U1_1.40 U1_1.41 U1_1.42 U1_1.43 U1_1.44 U1_2.1 U1_2.2 U1_2.3 U1_2.4 U1_2.5 U1_2.6 U1_2.7 U1_2.8 U1_2.9 U1_2.10 U1_2.11 U1_2.12 U1_2.13 U1_2.14 U1_2.15 U1_2.16 U1_2.17 U1_2.18 U1_2.19 U1_2.20 U1_2.21 U1_3.1 U1_3.2 U1_3.3 U1_3.4 U1_3.5 U1_3.6 U1_3.7 U1_3.8 U1_3.9 U1_3.10 U1_3.11 U1_3.12 U1_3.13 U1_3.14 U1_3.15 U1_3.16 U1_3.17 U1_3.18 U1_3.19 U1_3.20 U1_3.21 U1_3.22 U1_3.23 U1_3.24 U1_3.25 U1_3.26 U1_3.27 U1_3.28 U1_3.29 U1_3.30 U1_3.31 U1_3.32 U1_3.33 U1_3.34 U1_3.35 U1_3.36 U1_3.37 U1_3.38 U1_3.39 U1_3.40 U1_3.41 U1_3.42 U1_3.43 U1_3.44 U2_1.1 U2_1.2 U2_1.3 U2_1.4 U2_1.5 U2_1.6 U2_1.7 U2_1.8 U2_1.9 U2_1.10 U2_1.11 U2_1.12 U2_1.13 U2_1.14 U2_1.15 U2_1.16 U2_1.17 U2_1.18 U2_1.19 U2_1.20 U2_1.21 U2_1.22 U2_1.23 U2_1.24 U2_1.25 U2_1.26 U2_1.27 U2_1.28 U2_1.29 U2_1.30 U2_1.31 U2_1.32 U2_1.33 U2_1.34 U2_1.35 U2_1.36 U2_1.37 U2_1.38 U2_1.39 U2_1.40 U2_1.41 U2_1.42 U2_1.43 U2_1.44 UART.1 UART.2 UART.3 UART_1.1 UART_1.2 UART_1.3 USB1.1 USB1.2 USB1.3 USB1.4 USB1.5 USB1.6 VIN.1 VIN.2 VIN_1.1 VIN_1.2 VOUT.1 VOUT.2 VOUT_1.1 VOUT_1.2 X1_1.1 X1_1.2 X1_2.1 X1_2.2 X1_3.1 X1_3.2 X2.1 X2.2